# Altium PCB PCB2.PcbDoc
Units mil, origin at the board's own origin, x right, y up, seen from the top; angles counter-clockwise.
Board outline 6000 x 4000 mil, 2 copper layers (Top Layer, Bottom Layer); 18 components, 10 nets, 64 pads, 0 vias.
Unrouted connection lines stored in the file: 33.
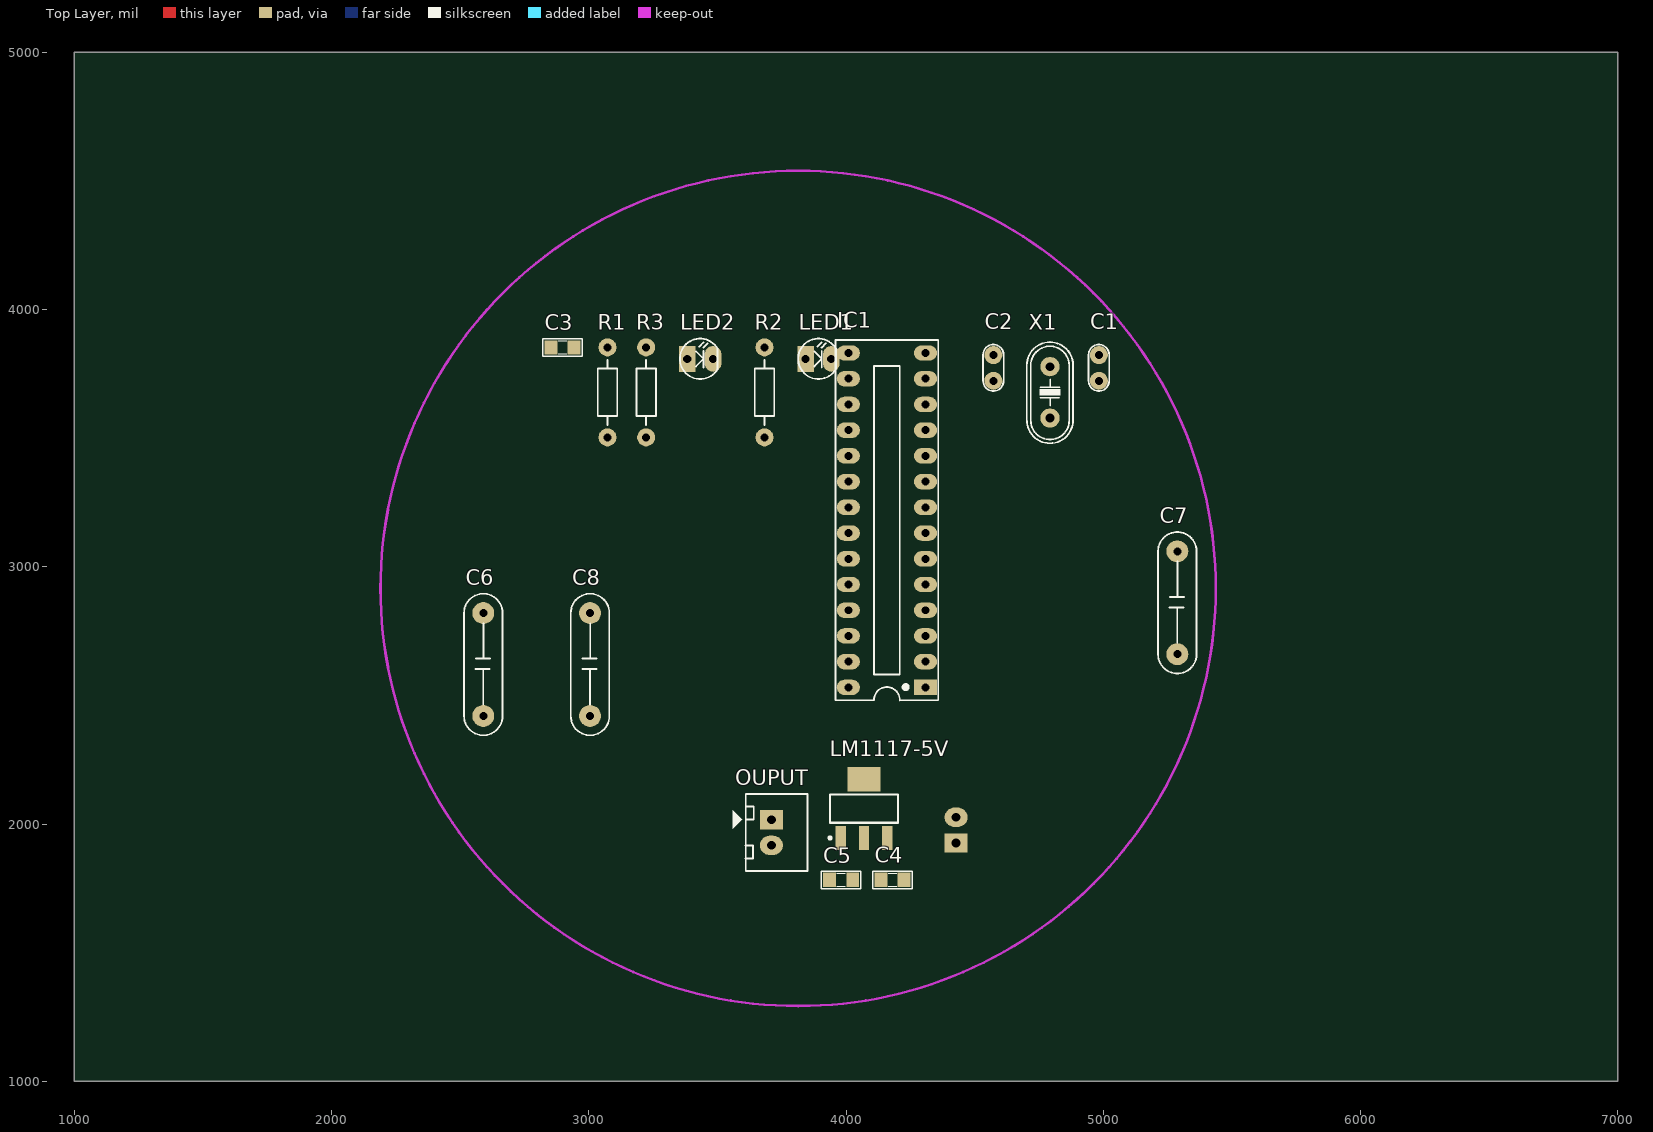
[diagram p0: Top Layer view]
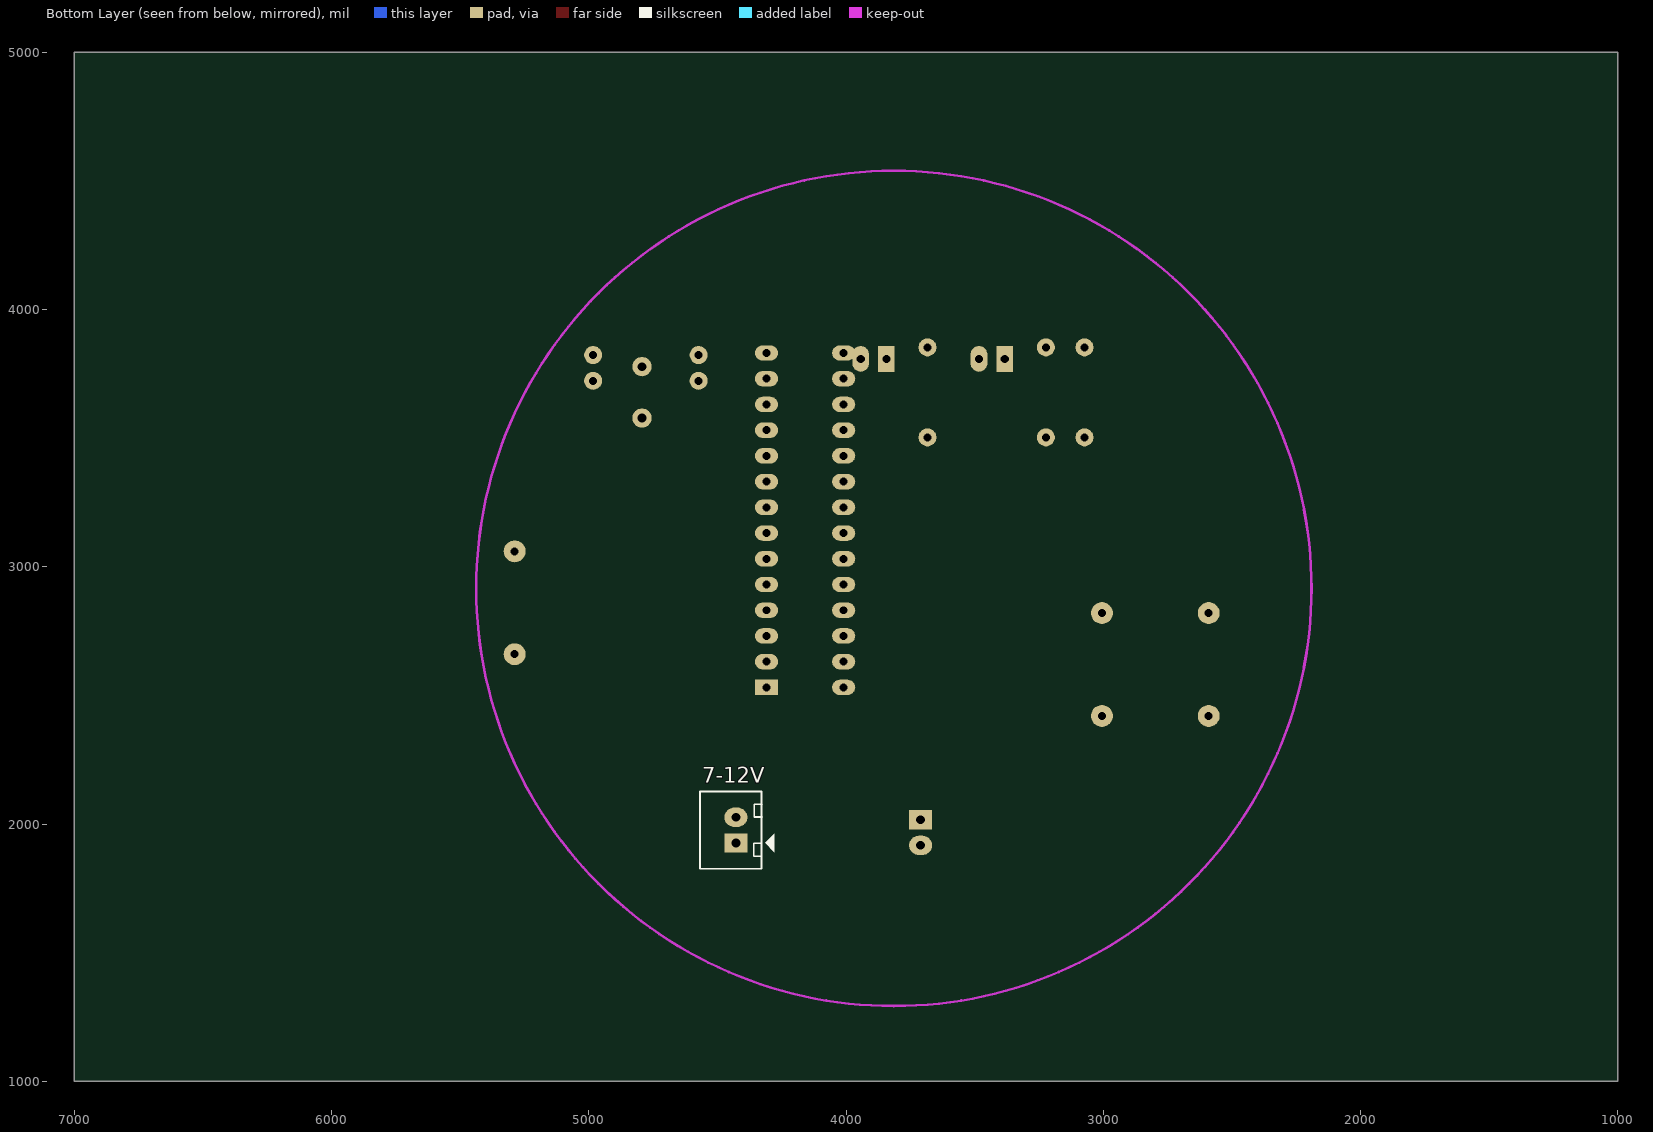
[diagram p1: Bottom Layer view, seen from below]

## Layer stack, top to bottom
Top Solder: solder mask 0.4, Solder Resist, Dk 3.5
Top Layer: signal copper 1.4
Dielectric 1: dielectric 12.6, FR-4, Dk 4.8
Bottom Layer: signal copper 1.4
Bottom Solder: solder mask 0.4, Solder Resist, Dk 3.5

## Board outline
1000,1000 7000,1000 7000,5000 1000,5000

## Design rules (kind name [scope] priority, off if disabled: settings)
Clearance Clearance_1 [All] p1: gap=10
Clearance CL5V [All vs InNet('+5V')] p2: gap=20
PolygonConnect [All] p1: connectstyle=Relief reliefconductorwidth=10 reliefentries=4 polygonreliefangle="90 Angle" airgapwidth=10
RoutingVias [All] p1: holewidth=28 width=50 viastyle="Through Hole" minholewidth=28 minwidth=50 maxholewidth=28 maxwidth=50
SolderMaskExpansion [All] p1: expansion=5
UnpouredPolygon [All] p1: allowunpoured=FALSE
Width +5V [InNet('+5V')] p1: maxlimit=30 minlimit=10 preferedwidth=25
Width 12v [InNet('Net7-12V_2')] p2: maxlimit=40 minlimit=25 preferedwidth=30
Width [All] p3: maxlimit=10 minlimit=10 preferedwidth=10
29 further rules are at their usual default settings.

## Components (designator, comment, footprint, x,y, rotation, side; value= is the part's Value field where it differs from the comment)
7-12V "JP2" CON2 4428,1926 r90 bottom
C1 "22pF" CN1 4983,3723 r90 top
C2 "22pF" CN1 4573,3723 r90 top
C3 "100nF" SM-0805 2898,3853 r0 top
C4 "104" SM-0805 4181,1783 r0 top
C5 "104" SM-0805 3981,1783 r0 top
C6 "104" CN4 2590,2420 r90 top
C7 "104" CN4 5288,2660 r90 top
C8 "104" CN4 3005,2420 r90 top
IC1 "PIC16F886" DIP28/W0.3 4309,2531 r90 top
LED1 "LED" LED-3 3843,3808 r0 top
LED2 "LED" LED-3 3383,3808 r0 top
LM1117-5V "LM1117" SOT223-4N 4070,2060 r90 top
OUPUT "JP2" CON2 3710,2017 r270 top
R1 "4.7k" R1/4W 3073,3503 r90 top
R2 "220" R1/4W 3683,3503 r90 top
R3 "220" R1/4W 3223,3503 r90 top
X1 "4Mhz" XT2 4793,3678 r90 top

## Footprints (in the part's own frame and the unit in brackets; to place one, negate y for a bottom-side part, rotate by r counter-clockwise, add the part's x,y. Pads: shape width x height; smd on the part's side, far side on the other; paste and mask are expansions set on the pad)
CN1 [mil]
  round 70 hole 31: 1(0,0) 2(100,0)
  silkscreen extent -40,-40 141,40, body extent -60,-30 170,37, height 265
CN4 [mil] "Cap np W 0.4"
  round 85 hole 31: 1(0,0) 2(400,0)
  silkscreen extent -75,-75 475,75
CON2 [mil] "CON2"
  rect 75x90 hole 34: 1(0,0)
  oval 75x90 hole 34: 2(100,0)
  silkscreen extent -100,-150 200,140, body extent -68,-70 168,107, height 236
DIP28/W0.3 [mil] "28 PIN, W 300mil, Pin to pin 100mil"
  rect 60x90 hole 31: 1(0,0)
  oval 60x90 hole 31: 2(100,0) 3(200,0) 4(300,0) 5(400,0) 6(500,0) 7(600,0) 8(700,0) 9(800,0) 10(900,0) 11(1000,0) 12(1100,0) 13(1200,0) 14(1300,0) 15(1300,300) 16(1200,300) 17(1100,300) 18(1000,300) 19(900,300) 20(800,300) 21(700,300) 22(600,300) 23(500,300) 24(400,300) 25(300,300) 26(200,300) 27(100,300) 28(0,300)
  silkscreen extent -50,-50 1350,350, body extent -50,-10 1367,300, height 200
LED-3 [mil] "LED 2 PIN, 3ly Only colour"
  rect 65x100 hole 32: 1(0,0)
  oval 65x100 hole 32: 2(100,0)
  silkscreen extent -29,-78 118,79, body extent -25,-75 113,75, height 217
R1/4W [mil] "R 1/4W, 2 Pin, 350mil"
  round 70 hole 31: 1(0,0) 2(350,0)
  silkscreen extent 48,-38 302,38, body extent -40,-47 386,47, height 111
SM-0805 [mil] "Compoment SMD 80x50mil"
  rect 50x55 smd: 1(-45,0) 2(45,0)
  silkscreen extent -77,-34 76,33, body extent -40,-27 40,23, height 24
SOT223-4N [mm] "SOT223, 4-Leads, Body 6.5x3.5mm, Pitch 2.3mm, Lead Span 7mm, IPC Medium Density"
  rect 2.4x1 smd: 1(-2.9,2.3) 2(-2.9,0) 3(-2.9,-2.3)
  rect 2.4x3.3 smd: 4(2.9,0)
  silkscreen extent -3.02,-3.35 1.4,3.47, body extent -3.39,-3.27 3.5,3.23, height 1.72
XT2 [mil] "Footpin for Crystal 2 pin"
  round 75 hole 34: 1(-100,0) 2(100,0)
  silkscreen extent -198,-90 195,90, body extent -233,-93 213,90, height 138

## Part data
7-12V OUPUT: library part Con2, "Connector 2"
C1 C2: library part CN1, "Cap np  1pF - 472pF"
C3 C4 C5: library part CM, "Cap SMD"
C6 C7 C8: library part CN4, "Cap np W0.4"
IC1: "8-Bit CMOS FLASH Microcontroller, 8K x 14 words FLASH, 368 x 8 Bytes RAM, 4 MHz, 28-Pin PDIP 300mil, 4 to 5.5V VDD Range, Commercial Temperature"
LED1 LED2: "LED Single colour Green and Red"
LM1117-5V: "3v3"
R1 R2 R3: library part R, "Resistor 1/4W"
X1: library part XT2, "Crystal For all Crystal 2pin."

## Nets (pads, with @x,y where several pads share a name; then routed paths per layer and width w, separated by ;. In a path a pad name is that pad's centre, name@x,y a point inside that pad or via, vN(x,y) a via of type N, cw(c..) or ccw(c..) an arc to the next point about the centre after c; other vN are vias at no path point)
+5V: C5.2 C6.2 C7.2 C8.2 IC1.8 IC1.19 IC1.20 LM1117-5V.2 OUPUT.1 R1.2
GND: 7-12V.1 C1.1 C2.1 C3.1 C4.1 C5.1 C6.1 C7.1 C8.1 LM1117-5V.1 OUPUT.2 R2.2 R3.2
Net7-12V_2: 7-12V.2 C4.2 LM1117-5V.3
NetLED1_2: LED1.2 R2.1
NetLED2_2: LED2.2 R3.1
OSC1: C1.2 IC1.9 X1.1
OSC2: C2.2 IC1.10 X1.2
PB0: IC1.21 LED1.1
PB1: IC1.22 LED2.1
RESET: C3.2 IC1.1 R1.1
pads on no net: IC1.2 IC1.3 IC1.4 IC1.5 IC1.6 IC1.7 IC1.11 IC1.12 IC1.13 IC1.14 IC1.15 IC1.16 IC1.17 IC1.18 IC1.23 IC1.24 IC1.25 IC1.26 IC1.27 IC1.28 LM1117-5V.4

## Keep-outs
Keep-Out Layer:
  circle w10: c3814,2916 r1623.63